# Altium PCB bch-node_v0.2.PcbDoc
Units mm, origin at the board's own origin, x right, y up, seen from the top; angles counter-clockwise.
Board outline 36 x 44 mm, 4 copper layers (Top Layer, GND, VCC, Bottom Layer), stack 1.586 mm thick; 5 components, 0 nets, 118 pads, 0 vias.
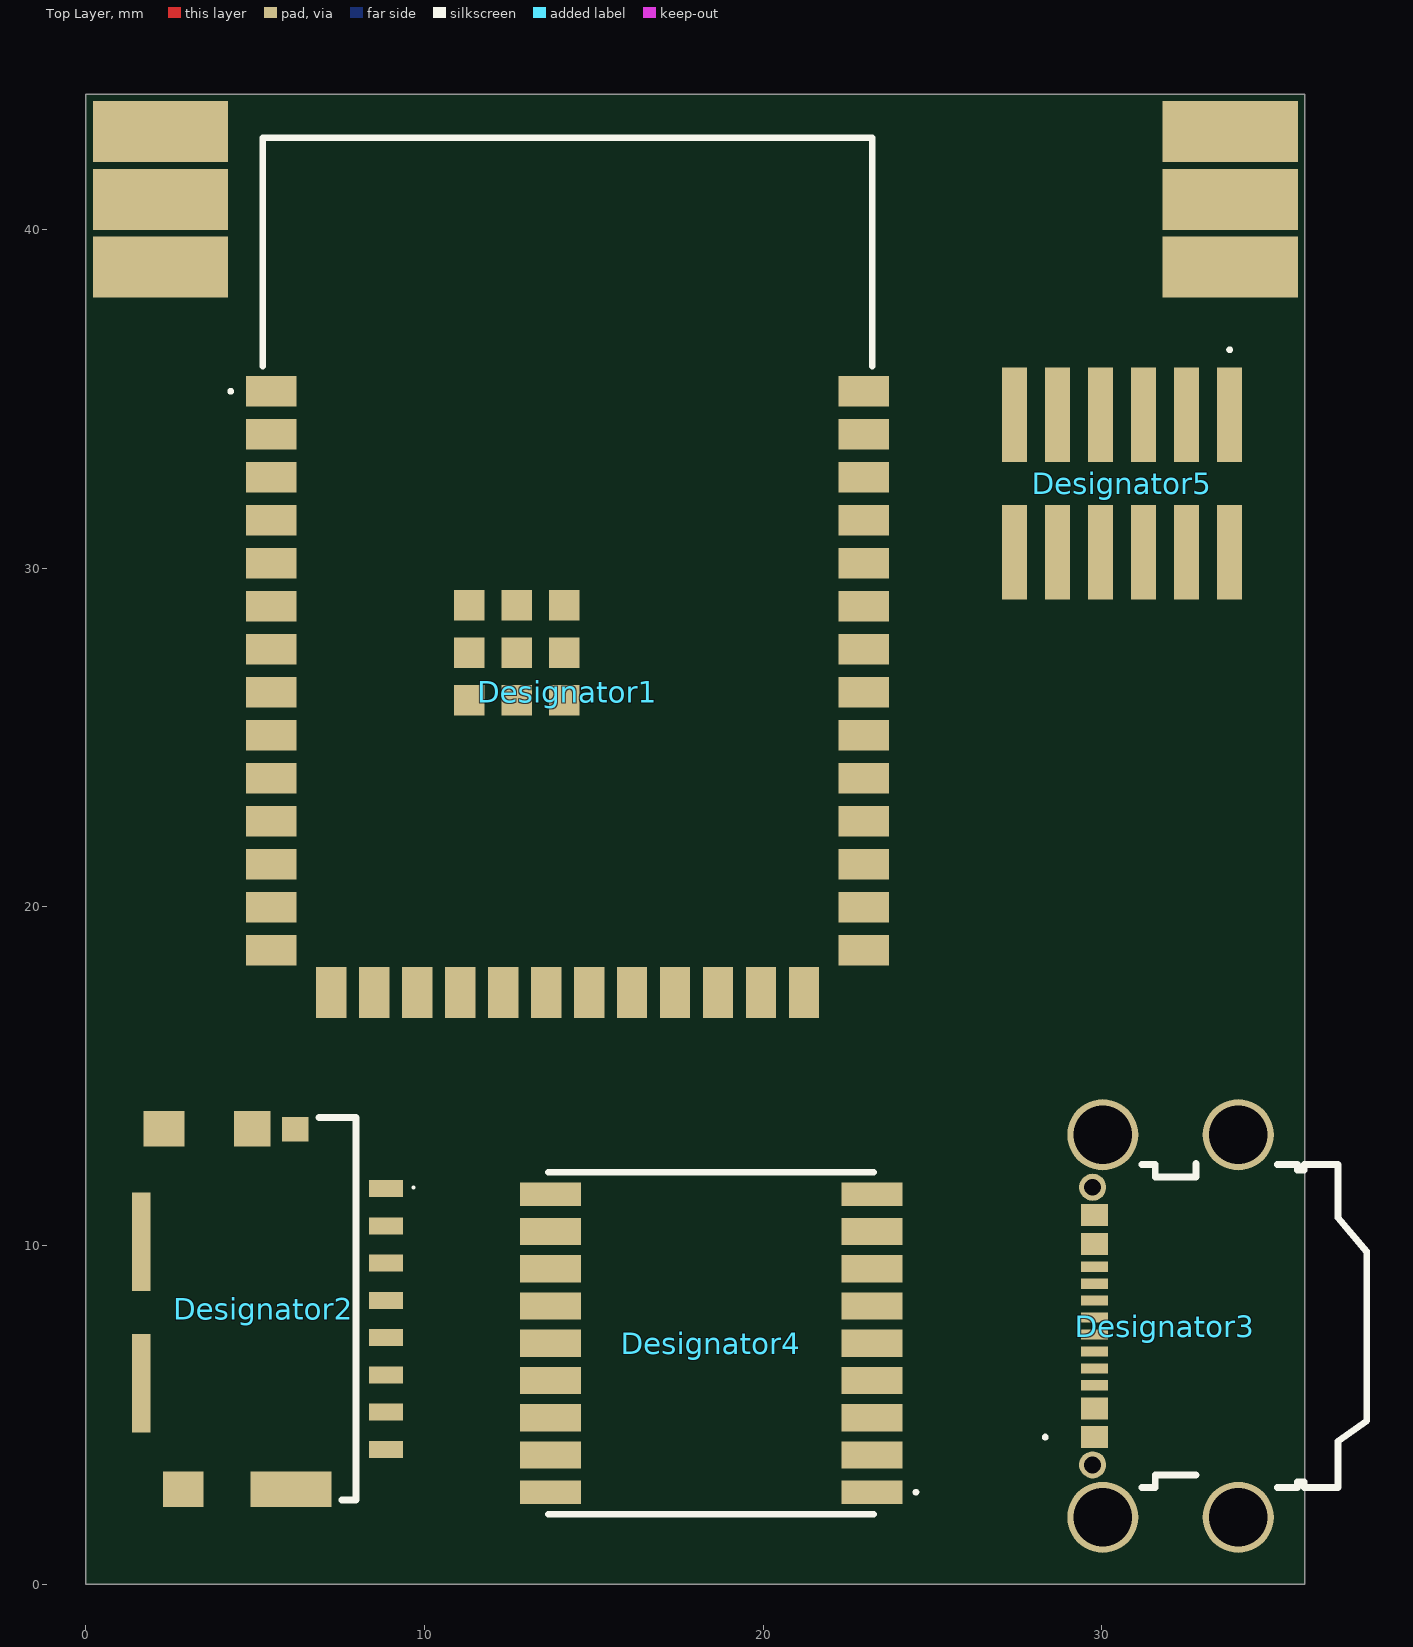
[diagram p0: Top Layer view]
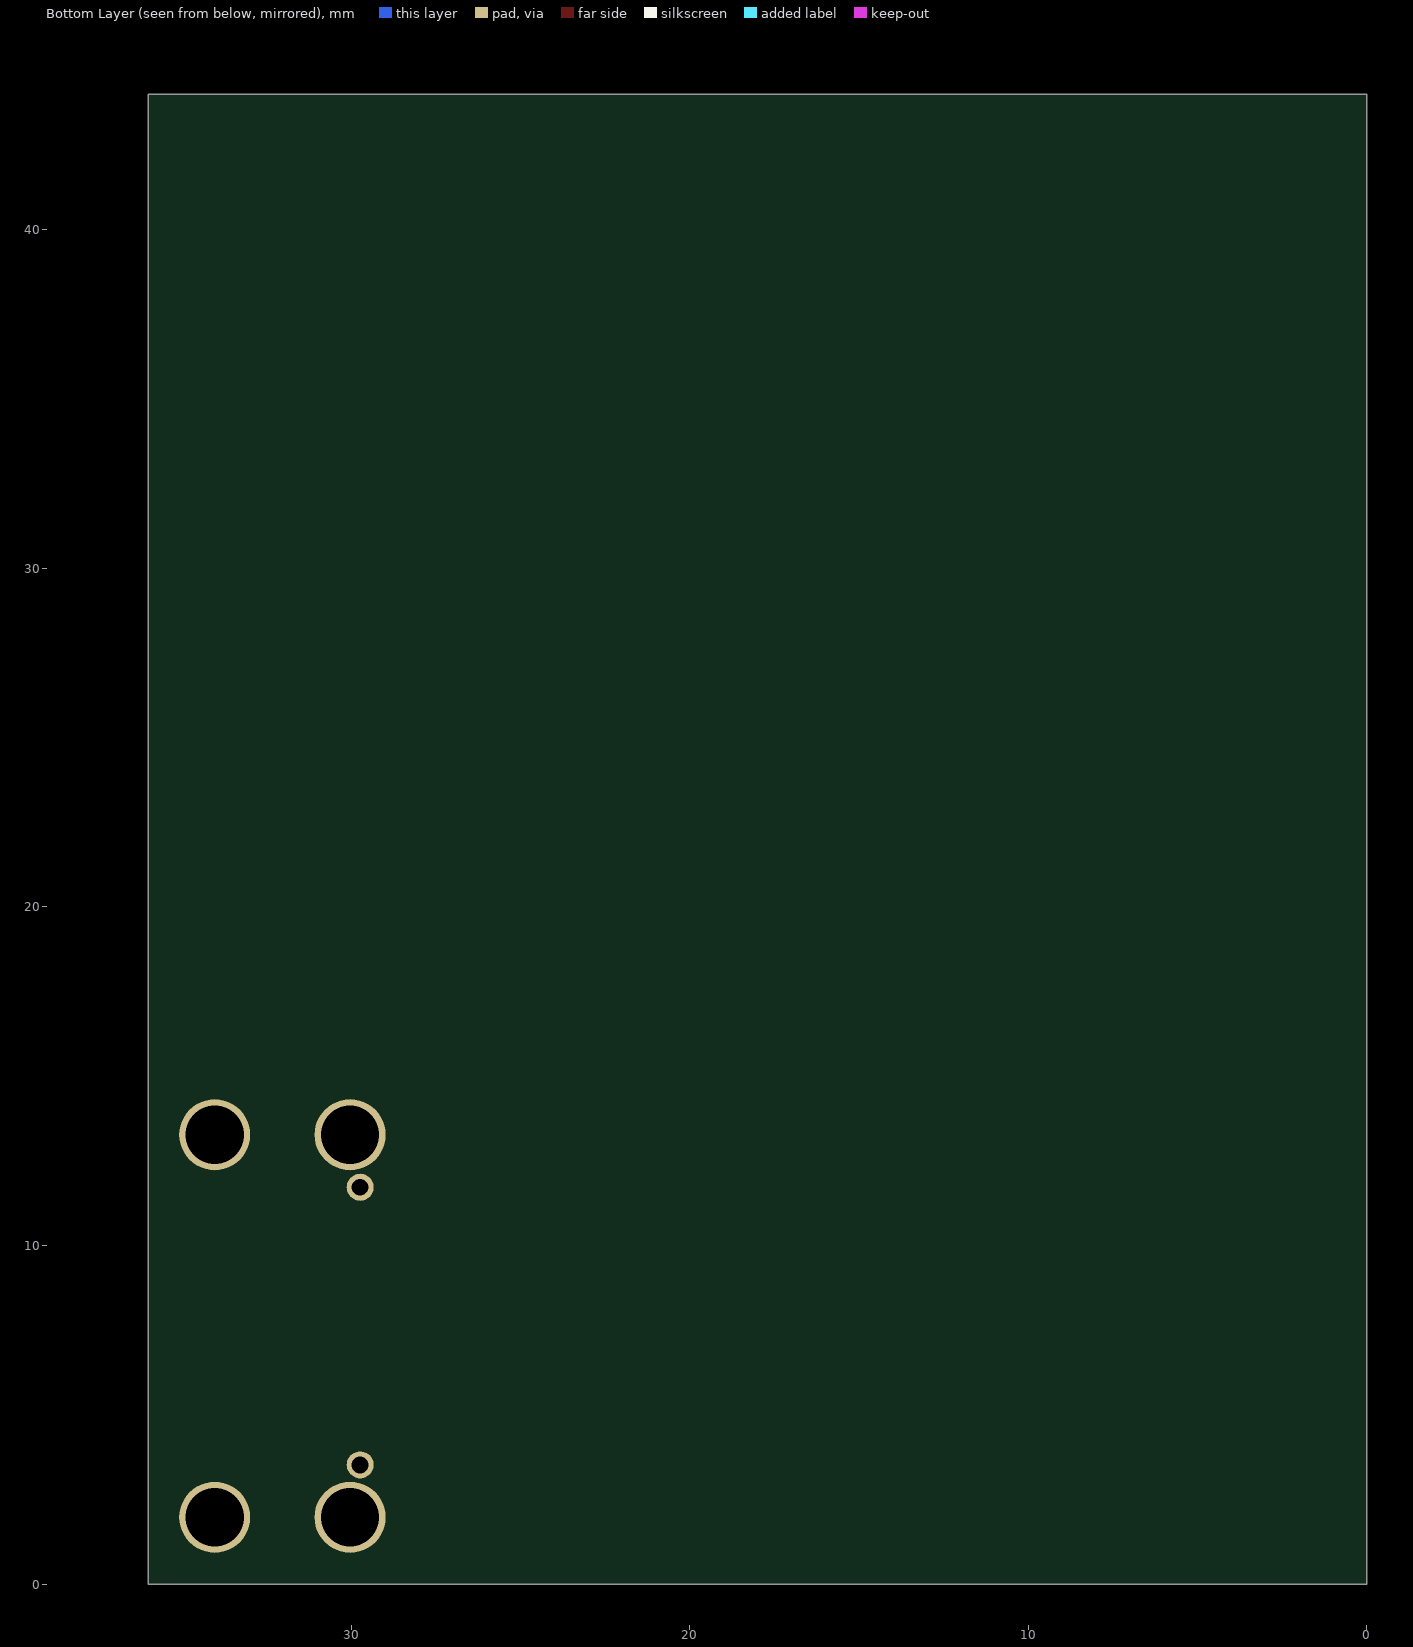
[diagram p1: Bottom Layer view, seen from below]

## Layer stack, top to bottom
Top Solder: solder mask 0.0102, Solder Resist, Dk 3.5
Top Layer: signal copper 0.035
Dielectric 2: prepreg 0.2104, PP-006, Dk 4.1
GND: signal copper 0.0152
Dielectric 1: dielectric 1.065, FR-4, Dk 4.8
VCC: signal copper 0.0152
Dielectric 3: prepreg 0.2104, PP-006, Dk 4.1
Bottom Layer: signal copper 0.035
Bottom Solder: solder mask 0.0102, Solder Resist, Dk 3.5

## Board outline
0,0 36,0 36,44 0,44

## Design rules (kind name [scope] priority, off if disabled: settings)
Clearance [All] p1: gap=0.254 ignorepadtopadclearanceinfootprint=FALSE
PolygonConnect [All] p1: connectstyle=Relief reliefconductorwidth=0.254 reliefentries=4 polygonreliefangle="90 Angle" airgapwidth=0.254
RoutingVias [All] p1: holewidth=0.711 width=1.27 viastyle="Through Hole" minholewidth=0.711 minwidth=1.27 maxholewidth=0.711 maxwidth=1.27
SolderMaskExpansion [All] p1: expansion=0.102 istentingtop=FALSE
Width [All] p1: maxlimit=0.254 minlimit=0.254 preferedwidth=0.254
30 further rules are at their usual default settings.

## Components (designator, comment, footprint, x,y, rotation, side; value= is the part's Value field where it differs from the comment)
Designator1 "Comment" ESP32S3WROOM1N16R8 14.224,29.972 r0 top
Designator2 "Comment" 1051620001 1.524,8.128 r90 top
Designator3 "Comment" USB472003A 34.036,7.62 r90 top
Designator4 "Comment" MAXM10S00B 18.466,7.112 r0 top
Designator5 "Comment" FTSH10601LDVK 30.607,32.509 r180 top

## Footprints (in the part's own frame and the unit in brackets; to place one, negate y for a bottom-side part, rotate by r counter-clockwise, add the part's x,y. Pads: shape width x height; smd on the part's side, far side on the other; paste and mask are expansions set on the pad)
1051620001 [mm]
  rect 0.5x1 smd: 1(3.55,-7.34) 2(2.45,-7.34) 3(1.35,-7.34) 4(0.25,-7.34) 5(-0.85,-7.34) 6(-1.95,-7.34) 7(-3.05,-7.34) 8(-4.15,-7.34)
  rect 0.72x0.78 smd: 9(5.31,-4.66)
  rect 1.05x1.08 smd: 10(5.325,-3.39)
  rect 1.05x1.2 smd: 11(5.325,-0.78) 12(-5.325,-1.35)
  rect 1.05x2.39 smd: 13(-5.325,-4.535)
  rect 2.91x0.55 smd: 14(1.986,-0.105) 15(-2.204,-0.105)
  silkscreen extent -5.65,-8.18 5.65,-5.36, body extent -5.65,-7.83 5.65,-0.23, height 1.45
ESP32S3WROOM1N16R8 [mm]
  rect 1.5x0.9 smd: 1(-8.75,5.26) 2(-8.75,3.99) 3(-8.75,2.72) 4(-8.75,1.45) 5(-8.75,0.18) 6(-8.75,-1.09) 7(-8.75,-2.36) 8(-8.75,-3.63) 9(-8.75,-4.9) 10(-8.75,-6.17) 11(-8.75,-7.44) 12(-8.75,-8.71) 13(-8.75,-9.98) 14(-8.75,-11.25) 27(8.75,-11.25) 28(8.75,-9.98) 29(8.75,-8.71) 30(8.75,-7.44) 31(8.75,-6.17) 32(8.75,-4.9) 33(8.75,-3.63) 34(8.75,-2.36) 35(8.75,-1.09) 36(8.75,0.18) 37(8.75,1.45) 38(8.75,2.72) 39(8.75,3.99) 40(8.75,5.26)
  rect 0.9x1.5 smd: 15(-6.985,-12.5) 16(-5.715,-12.5) 17(-4.445,-12.5) 18(-3.175,-12.5) 19(-1.905,-12.5) 20(-0.635,-12.5) 21(0.635,-12.5) 22(1.905,-12.5) 23(3.175,-12.5) 24(4.445,-12.5) 25(5.715,-12.5) 26(6.985,-12.5)
  rect 0.9x0.9 smd: 41(-1.5,-2.46) 42(-2.9,-1.06) 43(-2.9,-2.46) 44(-2.9,-3.86) 45(-1.5,-3.86) 46(-0.1,-3.86) 47(-0.1,-2.46) 48(-0.1,-1.06) 49(-1.5,-1.06)
  silkscreen extent -10,5.21 9,12.75, body extent -9,-12.75 9,12.75, height 3.25
FTSH10601LDVK [mm]
  rect 0.74x2.79 smd: 1(-3.175,-2.035) 2(-3.175,2.035) 3(-1.905,-2.035) 4(-1.905,2.035) 5(-0.635,-2.035) 6(-0.635,2.035) 7(0.635,-2.035) 8(0.635,2.035) 9(1.905,-2.035) 10(1.905,2.035) 11(3.175,-2.035) 12(3.175,2.035)
  silkscreen extent -3.22,-4 -3.13,-3.9, body extent -3.81,-3.36 3.81,3.36, height 6.2
MAXM10S00B [mm]
  rect 1.8x0.7 smd: 1(4.75,-4.4) 9(4.75,4.4) 10(-4.75,4.4) 18(-4.75,-4.4)
  rect 1.8x0.8 smd: 2(4.75,-3.3) 3(4.75,-2.2) 4(4.75,-1.1) 5(4.75,0) 6(4.75,1.1) 7(4.75,2.2) 8(4.75,3.3) 11(-4.75,3.3) 12(-4.75,2.2) 13(-4.75,1.1) 14(-4.75,0) 15(-4.75,-1.1) 16(-4.75,-2.2) 17(-4.75,-3.3)
  silkscreen extent -4.8,-5.05 6.1,5.05, body extent -4.85,-5.19 4.85,4.91, height 2.43
USB472003A [mm]
  rect 0.65x0.8 smd: A1(-3.28,4.25) A4(-2.43,4.25) A9(2.43,4.25) A12(3.28,4.25)
  rect 0.3x0.8 smd: A5(-1.25,4.25) A6(-0.25,4.25) A7(0.25,4.25) A8(1.25,4.25) B5(1.75,4.25) B6(0.75,4.25) B7(-0.75,4.25) B8(-1.75,4.25)
  round 0.8 hole 0.5: MH1(-4.1,4.3) MH2(4.1,4.3)
  round 2.1 hole 1.72: MH3(-5.65,4) MH4(5.65,4) MH5(-5.65,0) MH6(5.65,0)
  silkscreen extent -4.77,-3.8 4.8,5.75, body extent -5.8,-2.93 5.8,4.67, height 2.22

## Free pads (board coordinates)
  rect 4x1.8 smd: 1(2.2,38.9) 1(2.2,40.9) 1(2.2,42.9) 1(33.8,38.9) 1(33.8,40.9) 1(33.8,42.9)

## Nets (pads, with @x,y where several pads share a name; then routed paths per layer and width w, separated by ;. In a path a pad name is that pad's centre, name@x,y a point inside that pad or via, vN(x,y) a via of type N, cw(c..) or ccw(c..) an arc to the next point about the centre after c; other vN are vias at no path point)
pads on no net: Designator1.1 Designator1.2 Designator1.3 Designator1.4 Designator1.5 Designator1.6 Designator1.7 Designator1.8 Designator1.9 Designator1.10 Designator1.11 Designator1.12 Designator1.13 Designator1.14 Designator1.15 Designator1.16 Designator1.17 Designator1.18 Designator1.19 Designator1.20 Designator1.21 Designator1.22 Designator1.23 Designator1.24 Designator1.25 Designator1.26 Designator1.27 Designator1.28 Designator1.29 Designator1.30 Designator1.31 Designator1.32 Designator1.33 Designator1.34 Designator1.35 Designator1.36 Designator1.37 Designator1.38 Designator1.39 Designator1.40 Designator1.41 Designator1.42 Designator1.43 Designator1.44 Designator1.45 Designator1.46 Designator1.47 Designator1.48 Designator1.49 Designator2.1 Designator2.2 Designator2.3 Designator2.4 Designator2.5 Designator2.6 Designator2.7 Designator2.8 Designator2.9 Designator2.10 Designator2.11 Designator2.12 Designator2.13 Designator2.14 Designator2.15 Designator3.A1 Designator3.A4 Designator3.A5 Designator3.A6 Designator3.A7 Designator3.A8 Designator3.A9 Designator3.A12 Designator3.B5 Designator3.B6 Designator3.B7 Designator3.B8 Designator3.MH1 Designator3.MH2 Designator3.MH3 Designator3.MH4 Designator3.MH5 Designator3.MH6 Designator4.1 Designator4.2 Designator4.3 Designator4.4 Designator4.5 Designator4.6 Designator4.7 Designator4.8 Designator4.9 Designator4.10 Designator4.11 Designator4.12 Designator4.13 Designator4.14 Designator4.15 Designator4.16 Designator4.17 Designator4.18 Designator5.1 Designator5.2 Designator5.3 Designator5.4 Designator5.5 Designator5.6 Designator5.7 Designator5.8 Designator5.9 Designator5.10 Designator5.11 Designator5.12

## Silkscreen, mask and mechanical layers (free items; w line width, h text height)
Panel outline:
  the board outline again, w0.1